# Altium PCB smallerBoardDR1.PcbDoc (part 2 of 2)
Units mm, origin at the board's own origin, x right, y up, seen from the top; angles counter-clockwise.
Board outline 134.5 x 82.6 mm, 4 copper layers (Top Layer, Layer 1, Layer 2, Bottom Layer), stack 1.571 mm thick; 122 components, 129 nets, 552 pads, 17 vias.
Unrouted connection lines stored in the file: 319.
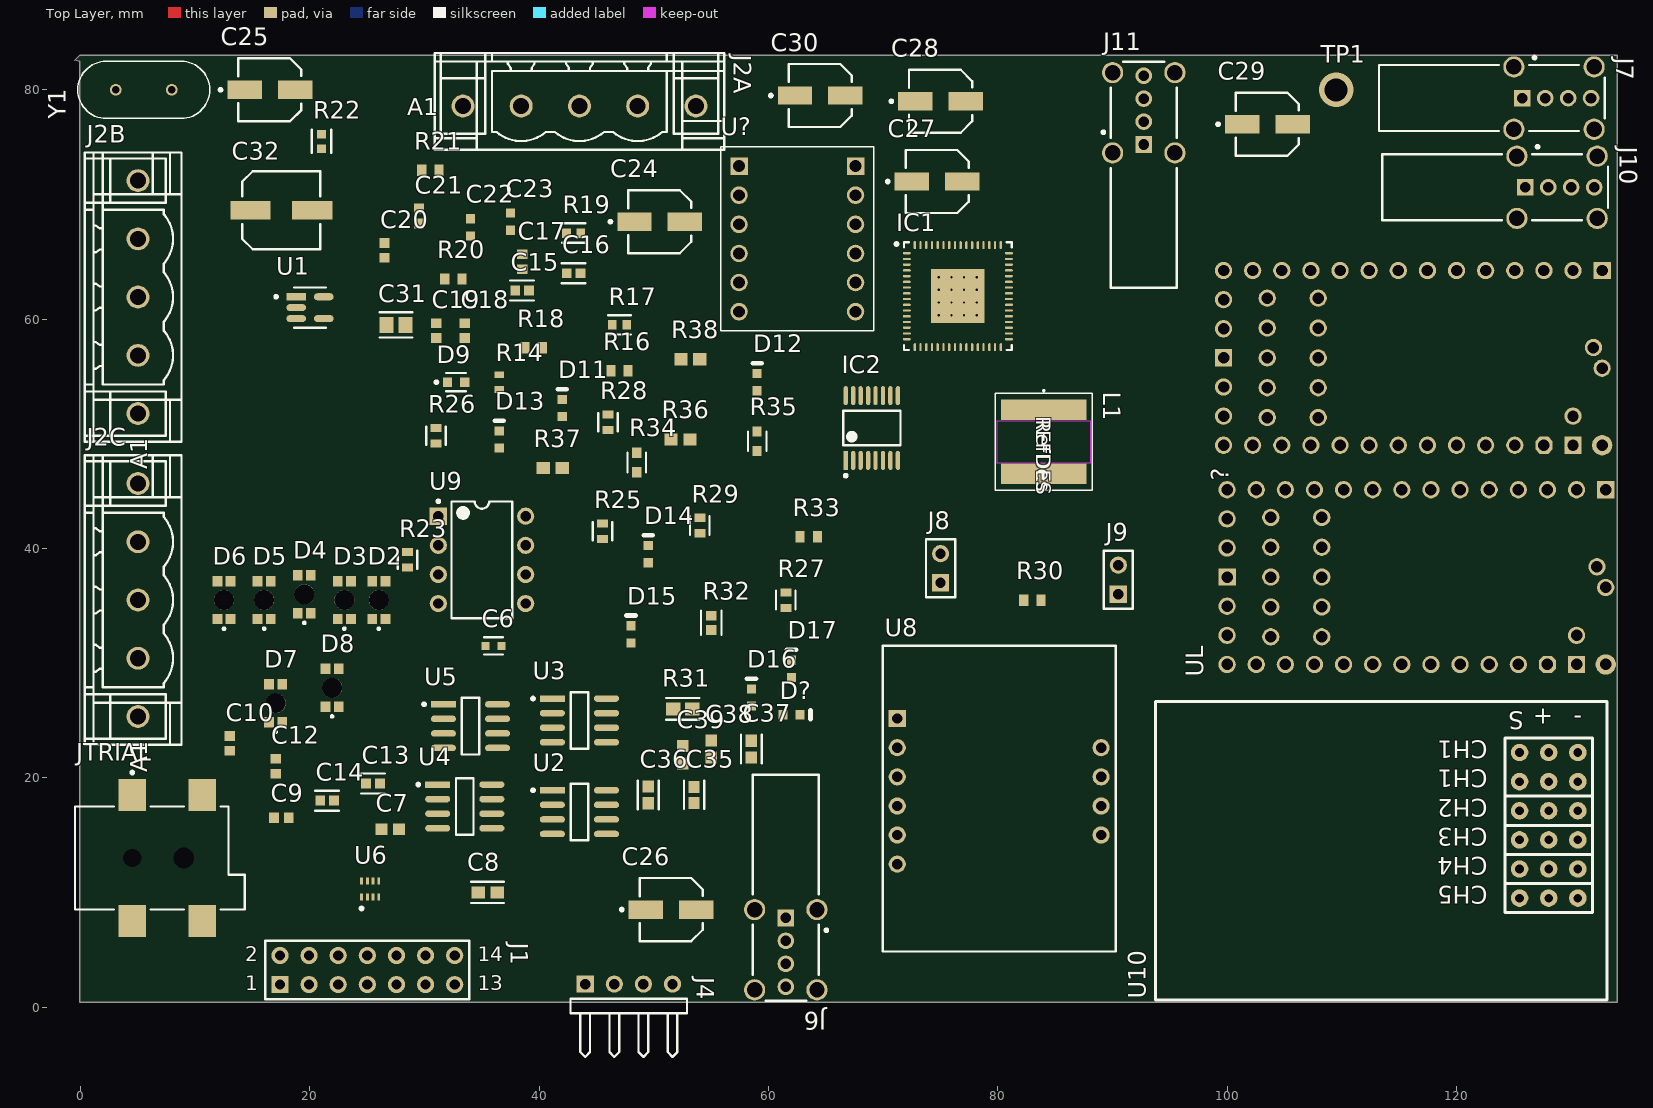
[diagram p0: Top Layer view]

## Via types
v1: diameter 0.5, hole 0.2, Top Layer to Bottom Layer, 16 vias
v2: diameter 3, hole 2, Top Layer to Bottom Layer, 1 vias

## Nets (pads, with @x,y where several pads share a name; then routed paths per layer and width w, separated by ;. In a path a pad name is that pad's centre, name@x,y a point inside that pad or via, vN(x,y) a via of type N, cw(c..) or ccw(c..) an arc to the next point about the centre after c; other vN are vias at no path point) (continued)
pads on no net: ?.0-RX1 ?.1-TX1 ?.3-LRCLK2 ?.3V3-1 ?.3V3-2 ?.4-BCLK2 ?.5-IN2 ?.6-OUT1D ?.7-RX2/OUT1A ?.8-TX2/IN1 ?.9-OUT1C ?.10-CS/MQSR ?.11-MOSI/CTX1 ?.12-MIO/MQSL ?.13-SCK/CRX1/LED ?.16-A2/RX4/SCL1 ?.17-A3/TX4/SDA1 ?.20-A6/TX5/LRCLK1 ?.21-A7/RX5/BCLK1 ?.24-A10/TX6/SCL2 ?.25-A11/SDA2 ?.26-A12/MOSI1 ?.27-A13/SCK1 ?.28-RX7 ?.29-TX7 ?.30-CRX3 ?.31-CTX3 ?.32-OUTB1 ?.33-MCLK2 ?.ON/OFF ?.PROGRAM ?.VBAT ?.VUSB D2.MH1 D3.MH1 D4.MH1 D5.MH1 D6.MH1 D7.MH1 D8.MH1 D17.2 IC1.24 IC1.40 IC1.46 IC2.9 IC2.10 IC2.11 IC2.12 IC2.13 IC2.14 J2A.0 J2B.0 J2C.0 JTRIAL.3 JTRIAL.MH1 JTRIAL.MH2 U1.4 U5.3 U5.4 U5.5 U6.1 U9.5 U9.6 U9.7 U?.HV4 U?.LV4 UL.3-LRCLK2 UL.3V3-1 UL.3V3-2 UL.4-BCLK2 UL.5-IN2 UL.6-OUT1D UL.7-RX2/OUT1A UL.9-OUT1C UL.10-CS/MQSR UL.11-MOSI/CTX1 UL.12-MIO/MQSL UL.13-SCK/CRX1/LED UL.16-A2/RX4/SCL1 UL.17-A3/TX4/SDA1 UL.18-A4/SDA0 UL.19-A5/SCL0 UL.21-A7/RX5/BCLK1 UL.22-A8/CTX1 UL.23-A9/CRX1/CCLK1 UL.24-A10/TX6/SCL2 UL.25-A11/SDA2 UL.26-A12/MOSI1 UL.27-A13/SCK1 UL.28-RX7 UL.29-TX7 UL.30-CRX3 UL.31-CTX3 UL.32-OUTB1 UL.33-MCLK2 UL.ON/OFF UL.PROGRAM UL.VBAT UL.VUSB
copper on no net:
  other v2: 109.5,80

## Polygon pours and split planes (outlines as drawn)
5V on Layer 1 "5V_L02_P000" (solid, pour order 0): 0,83 0,0 0.5,0.5 134,0.5 134,82.5 133.5,83

## Text inside footprints (layer, text, board x,y; h text height)
?: Mechanical 7 "COIN CEL" at 104.252,62.386 h0.94 r180; Mechanical 7 "3 VOLT" at 103.744,61.7 h0.94 r180; Mechanical 7 "USB" at 131.43,57.89 h1.97 r270; Mechanical 7 "TEENSY 4.0" at 122.54,56.62 h1.97 r180
J1: Top Overlay "2" at 14.332,3.992 h1.27; Top Overlay "1" at 14.332,1.452 h1.27; Top Overlay "14" at 34.652,3.992 h1.27; Top Overlay "13" at 34.652,1.452 h1.27
J2A: Top Overlay "A1" at 28.478,77.79 h1.5
J2B: Top Overlay "A1" at 5.79,46.898 h1.5 r90
J2C: Top Overlay "A1" at 5.79,20.478 h1.5 r90
L1: Top Overlay "REFDES" at 83.365,51.523 h1.27 r270; Top Overlay "RefDes" at 83.365,51.205 h1.27 r270; Mechanical 13 "RefDes2" at 83.365,51.523 h1.27 r270
U10: Top Overlay "-" at 130.961,25.883 h1.52 r180; Top Overlay "S" at 125.881,25.756 h1.52 r180; Top Overlay "+" at 128.421,26.01 h1.52 r180; Top Overlay "CH1" at 122.706,23.216 h1.52 r180; Top Overlay "CH5" at 122.706,10.516 h1.52 r180; Top Overlay "CH4" at 122.706,13.056 h1.52 r180; Top Overlay "CH3" at 122.706,15.596 h1.52 r180; Top Overlay "CH2" at 122.706,18.136 h1.52 r180; Top Overlay "CH1" at 122.706,20.676 h1.52 r180
UL: Mechanical 7 "COIN CEL" at 104.562,43.266 h0.94 r180; Mechanical 7 "3 VOLT" at 104.054,42.58 h0.94 r180; Mechanical 7 "USB" at 131.74,38.77 h1.97 r270; Mechanical 7 "TEENSY 4.0" at 122.85,37.5 h1.97 r180